# EAGLE board PCB-board-v1 (EAGLE 9.2.0)
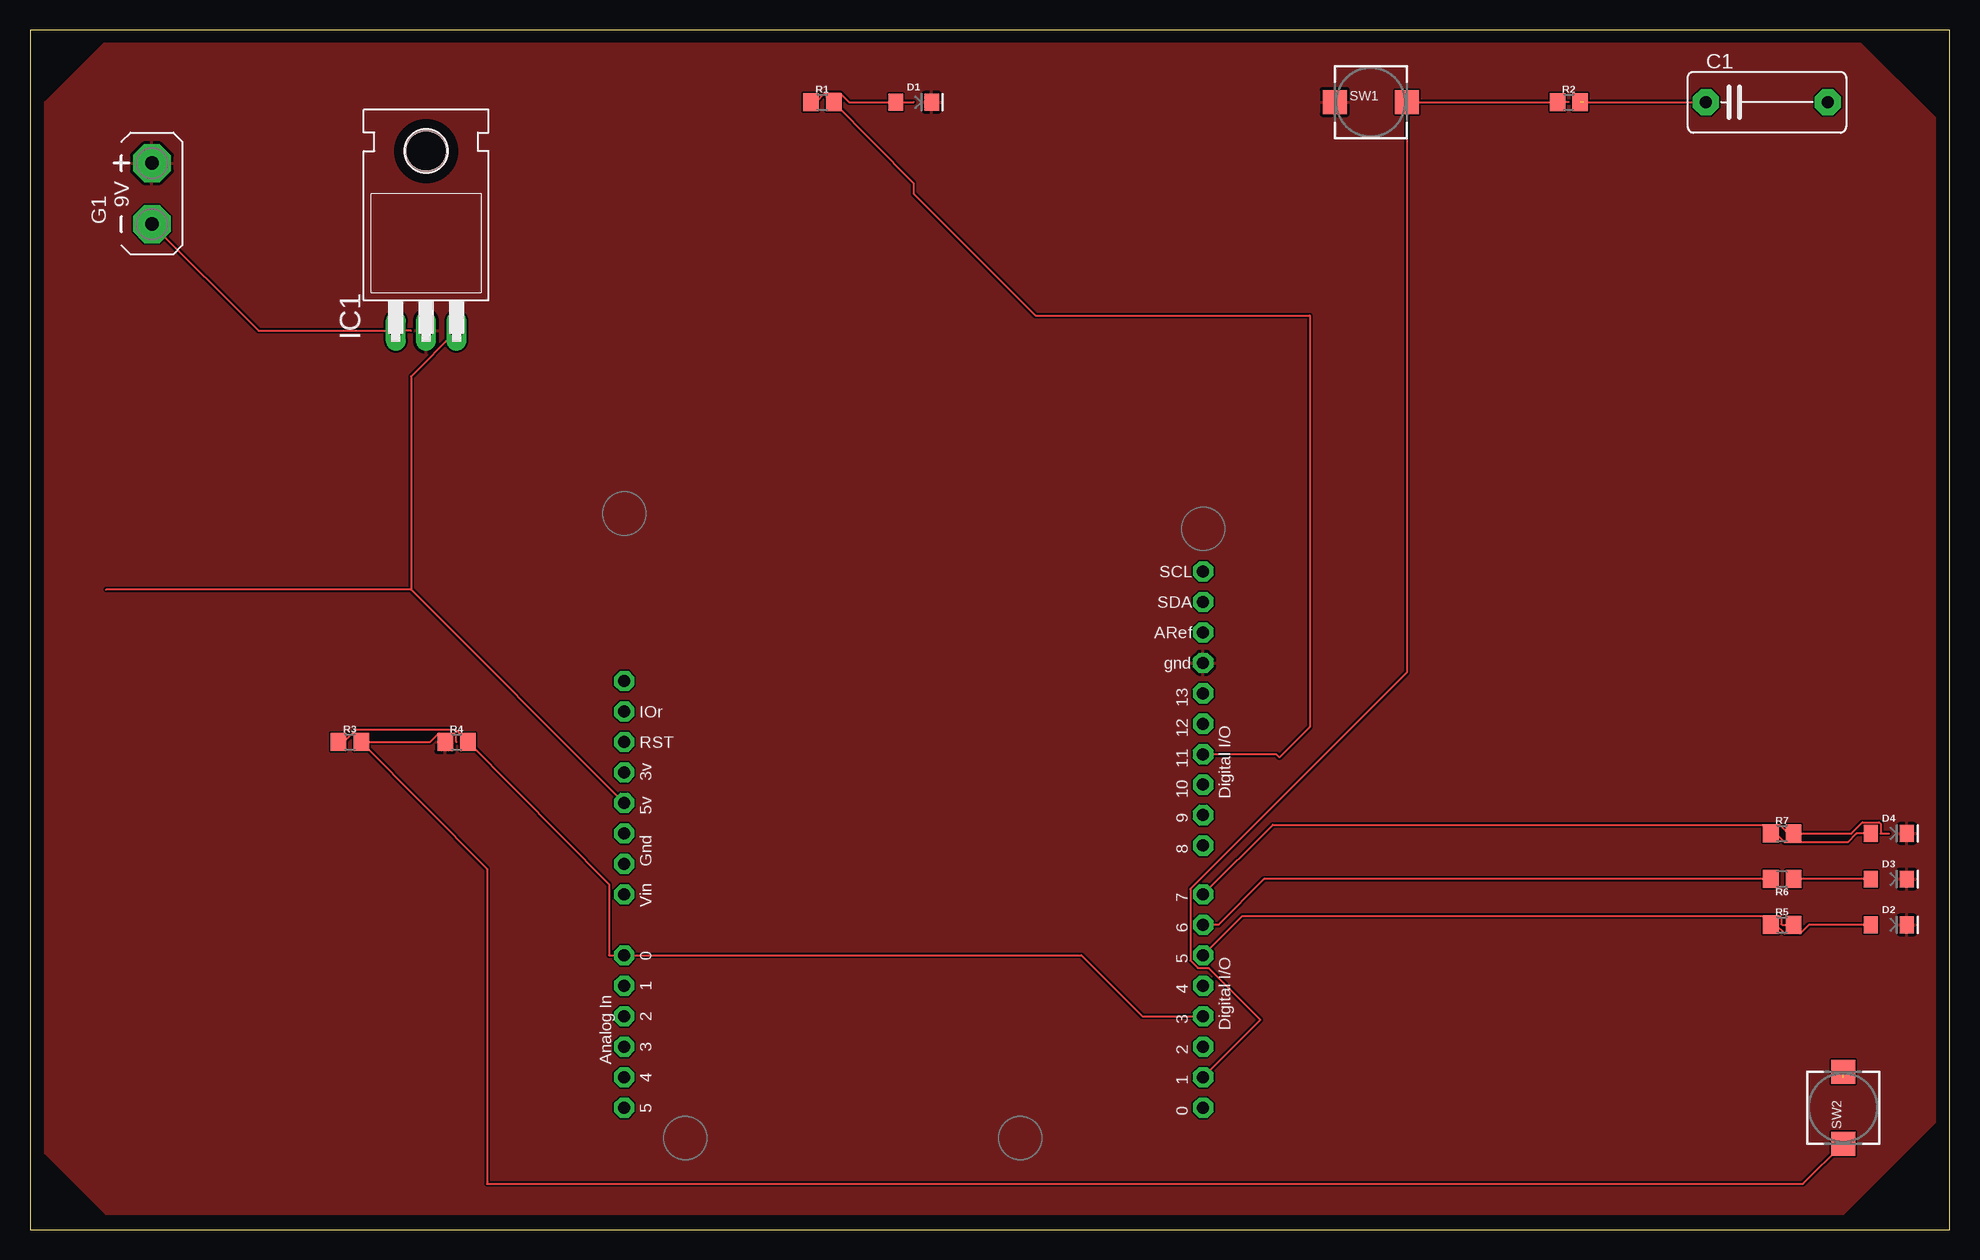
[diagram p0: board, top side]
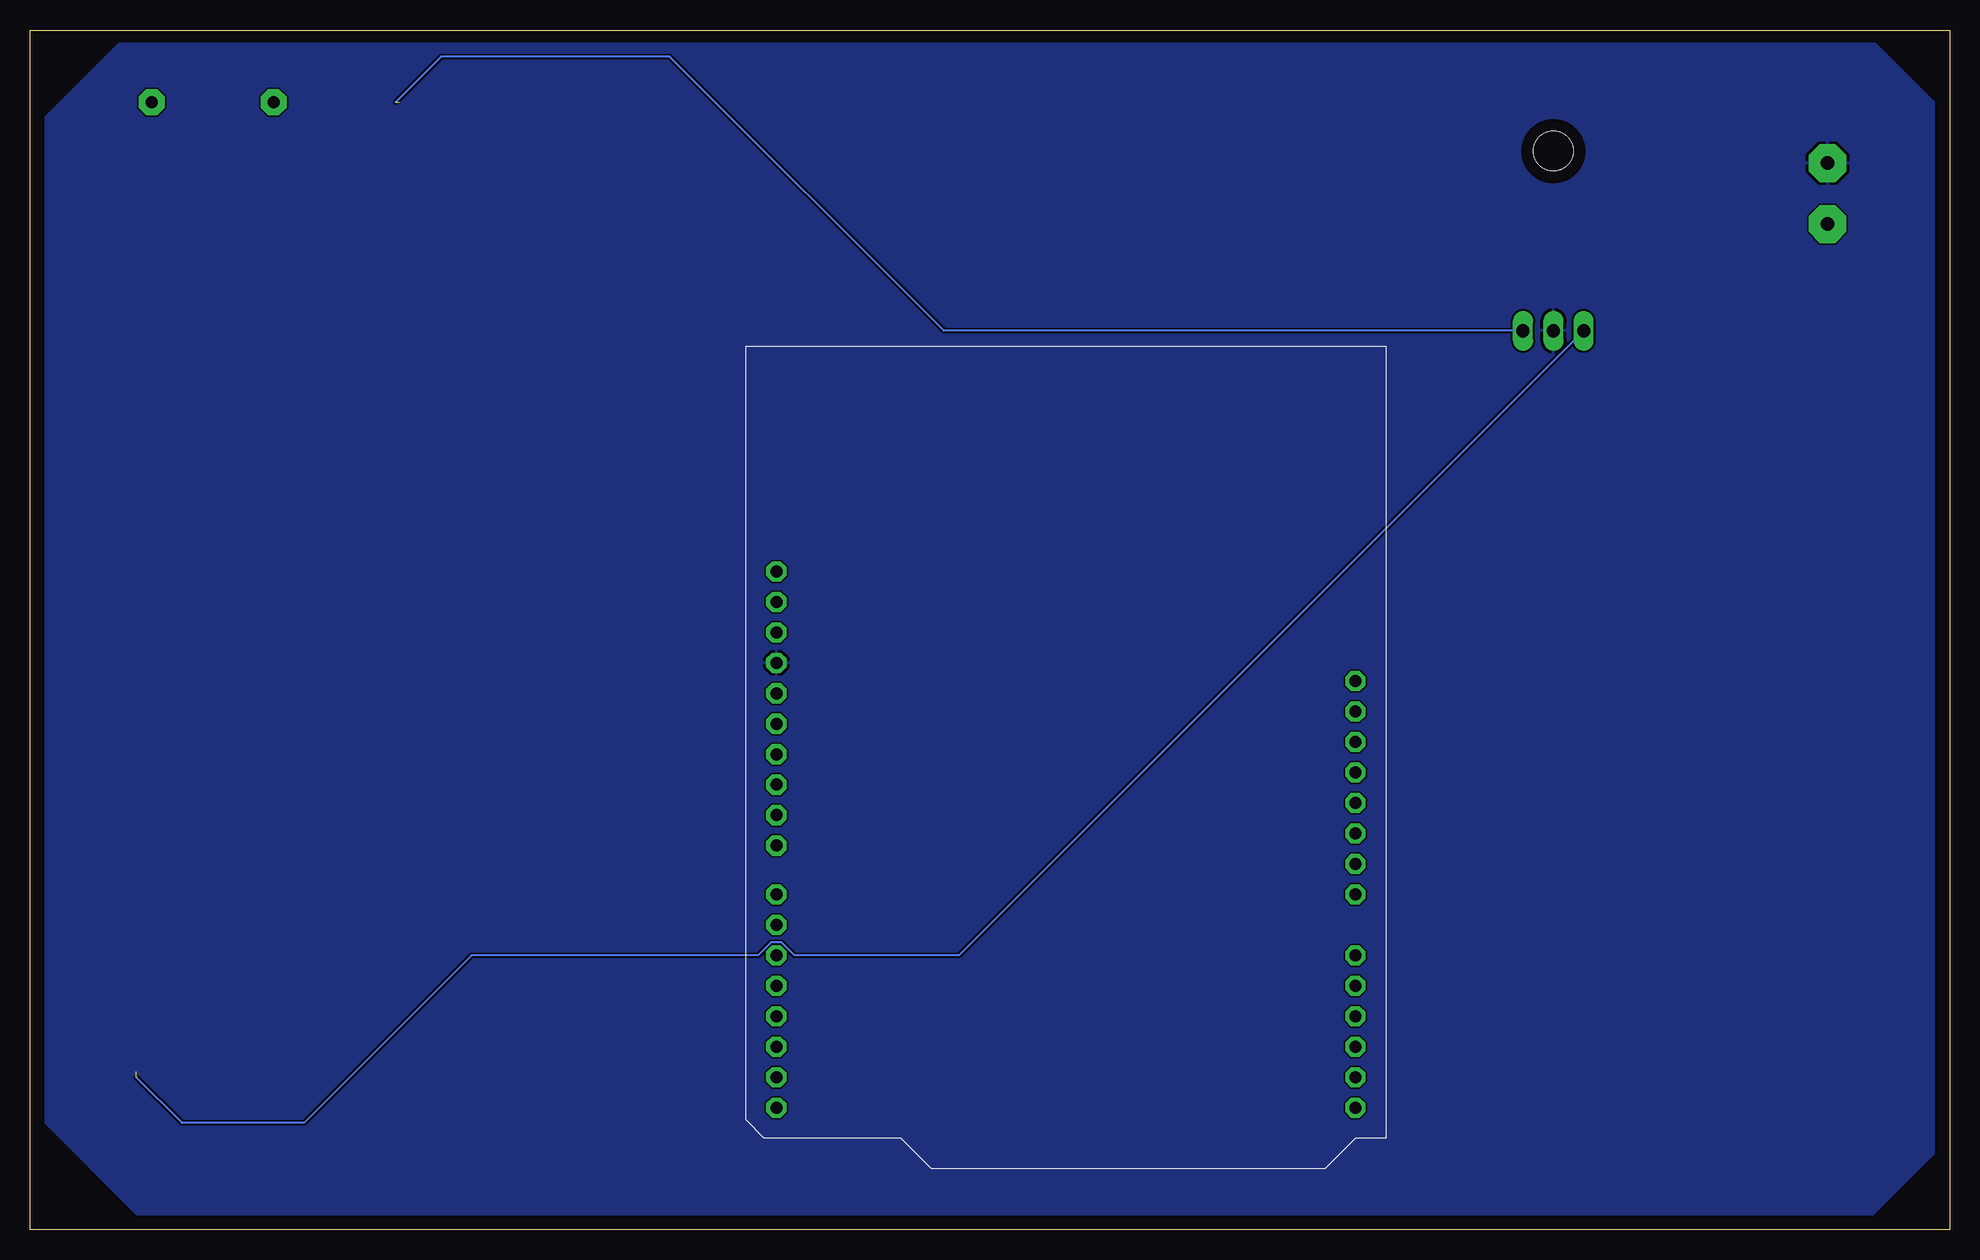
[diagram p1: board, bottom side, seen from below]

Size 160 x 100 mm. Coordinates in mm from the lower left corner, seen from the top.
Outline: 0,0 160,0 160,100 0,100 0,0
Copper layers (1*16): Top 0.035mm / dielectric 1.5mm / Bottom 0.035mm
Design rules "default": minimum track width 6mil, minimum drill 0.35mm, track to track 6mil, track to pad 6mil, pad to pad 6mil, via to via 6mil, smd to smd 6mil, copper to edge 40mil, drill to drill 6mil, minimum pad ring 10mil, minimum via ring 8mil, stop-mask expansion 4mil, vias tented up to drill 0mil, thermal gap 10mil

## Footprints (pad centres in the part's own frame; a part is rotated, then mirrored left to right if it is on the bottom)
C10B5 = drill 1.016 pad 2.159 octagon: 1 -5.08,0; 2 5.08,0
LED-1206 = smd 1.2 x 1.4: A -1.5,0; C 1.5,0
AB9V = drill 1.118 pad 3.15 octagon: + 0,2.54; - 0,-2.54
TO220H = drill 1.118 long: 1 -2.54,-10.16; 2 0,-10.16; 3 2.54,-10.16 | hole 3.302: 0,4.826
R0805 = smd 1.3 x 1.5: 1 -0.95,0; 2 0.95,0
PUSHBUTTON_SMD_SJ = smd 2 x 2: P$1 3,0; P$2 -3,0
ARDUINOR3-BPLACE = drill 1 pad 1.676 octagon: 3V 35.56,2.54; 5V 38.1,2.54; A0 50.8,2.54; A1 53.34,2.54; A2 55.88,2.54; A3 58.42,2.54; A4 60.96,2.54; A5 63.5,2.54; AREF 23.876,50.8; D0 63.5,50.8; D1 60.96,50.8; D2 58.42,50.8; D3 55.88,50.8; D4 53.34,50.8; D5 50.8,50.8; D6 48.26,50.8; D7 45.72,50.8; D8 41.656,50.8; D9 39.116,50.8; D10 36.576,50.8; D11 34.036,50.8; D12 31.496,50.8; D13 28.956,50.8; GND 26.416,50.8; GND1 43.18,2.54; GND2 40.64,2.54; IOREF 30.48,2.54; RESERVED 27.94,2.54; RESET 33.02,2.54; SCL 18.796,50.8; SDA 21.336,50.8; VIN 45.72,2.54

## Placement (x,y rotation side)
C1  [C10B5]  144.78,93.98 0 top
D1  BLUE  [LED-1206]  73.66,93.98 0 top
D2  BLUE  [LED-1206]  154.94,25.4 0 top
D3  BLUE  [LED-1206]  154.94,29.21 0 top
D4  BLUE  [LED-1206]  154.94,33.02 0 top
G1  AB9V  [AB9V]  10.16,86.36 0 top
IC1  7805T  [TO220H]  33.02,85.09 0 top
R1  10k  [R0805]  66.04,93.98 0 top
R2  10k  [R0805]  128.27,93.98 0 top
R3  10k  [R0805]  26.67,40.64 0 top
R4  10k  [R0805]  35.56,40.64 0 top
R5  10k  [R0805]  146.05,25.4 0 top
R6  10k  [R0805]  146.05,29.21 180 top
R7  10k  [R0805]  146.05,33.02 0 top
SW1  [PUSHBUTTON_SMD_SJ]  111.76,93.98 0 top
SW2  [PUSHBUTTON_SMD_SJ]  151.13,10.16 90 top
U1  ARDUINOR3-BPLACE  [ARDUINOR3-BPLACE]  46.99,73.66 270 top

## Library data of the parts
C1 = capacitor-wima
D1-D4 = SparkFun-LED; PROD_ID: DIO-09911
G1 = battery
IC1 SW1 SW2 U1 = adafruit
R1-R7 = rcl; SPICEPREFIX: R

## Nets
3V: U1.3V
GND: D1.C D2.C D3.C D4.C G1.+ IC1.2 R4.1 SW1.P$2 U1.GND
GND1: U1.GND1
GND2: U1.GND2
N$1: G1.- IC1.1 SW2.P$1
N$2: R1.2 U1.D11
N$3: D1.A R1.1
N$5: R2.1 SW1.P$1 U1.D1
N$6: R3.2 SW2.P$2
N$7: D2.A R5.1
N$8: R5.2 U1.D5
N$9: D3.A R6.1
N$10: R6.2 U1.D6
N$11: R7.2 U1.D7
N$12: D4.A R7.1
N$13: R3.1 R4.2 U1.A0 U1.D3
VCC: C1.1 IC1.3 R2.2 U1.5V
VIN: U1.VIN

## Tracks (layer width: path | path; a pad name or v marks a point on that pad's centre or on a via)
GND
  pour Top: 1.27,93.98 6.35,99.06 152.4,99.06 158.75,92.71 158.75,8.89 151.13,1.27 7.62,1.27 6.35,1.27 1.27,6.35
  pour Bottom: 1.27,93.98 6.35,99.06 152.4,99.06 158.75,92.71 158.75,8.89 151.13,1.27 6.35,1.27 1.27,6.35
N$1  (1 unrouted)
  Top 0.152: G1.- 19.05,74.93 IC1.1 31.75,74.93
  Bottom 0.152: IC1.1 82.55,22.86 96.28,22.86 97.35,23.93 98.23,23.93 99.3,22.86 123.19,22.86 137.16,8.89 147.32,8.89 151.13,12.7
N$2
  Top 0.152: R1.2 73.66,87.21 73.66,86.36 83.82,76.2 106.68,76.2 106.68,41.91 104.14,39.37 103.89,39.62 U1.D11
N$3
  Top 0.152: R1.1 65.52,93.98 66.25,94.71 67.53,94.71 68.26,93.98 D1.A 73.66,93.98
N$5
  Top 0.152: 128.27,93.98 R2.1 SW1.P$1 114.76,46.42 96.72,28.38 96.72,22.42 97.35,21.79 98.23,21.79 102.56,17.47 U1.D1
N$6
  Top 0.152: SW2.P$2 147.78,3.81 38.1,3.81 38.1,30.06 R3.2 33.34,40.64 34.06,41.37 35.35,41.37 35.49,41.23 35.49,40.71 35.56,40.64
N$7
  Top 0.152: D2.A 148.27,25.4 147.54,24.67 146.25,24.67 145.53,25.4 R5.1
N$8
  Top 0.152: U1.D5 101.06,26.13 145.84,26.13 145.98,26 145.98,25.47 146.05,25.4 R5.2
N$9
  Top 0.152: D3.A R6.1
N$10
  Top 0.152: R6.2 102.87,29.21 99.06,25.4 U1.D6
N$11
  Top 0.152: U1.D7 103.6,33.75 145.84,33.75 146.57,33.02 R7.2 151.82,33.02 152.75,33.95 154.13,33.95 154.27,33.81 154.27,33.02 154.94,33.02
N$12
  Top 0.152: D4.A 152.25,33.02 151.52,32.29 146.25,32.29 145.53,33.02 R7.1
N$13
  Top 0.152: R3.1 26.15,40.64 27.18,41.67 35.48,41.67 35.79,41.36 35.79,41.26 R4.2 48.26,28.79 48.26,22.86 U1.A0 87.63,22.86 92.71,17.78 U1.D3
VCC  (1 unrouted)
  Top 0.152: U1.5V 31.75,53.34 | 31.75,53.34 6.35,53.34 | IC1.3 31.75,71.12 31.75,53.34 | R2.2 C1.1
  Bottom 0.152: IC1.3 83.82,74.93 106.68,97.79 125.73,97.79 129.54,93.98